# Altium PCB JacdacPowerUsbC4PortShared 31.PcbDoc (part 2 of 2)
Units mm, origin at the board's own origin, x right, y up, seen from the top; angles counter-clockwise.
Board outline 22.7 x 29.15 mm, 2 copper layers (Top Layer, Bottom Layer), stack 1.525 mm thick; 52 components, 32 nets, 174 pads, 34 vias.
Unrouted connection lines stored in the file: 59.
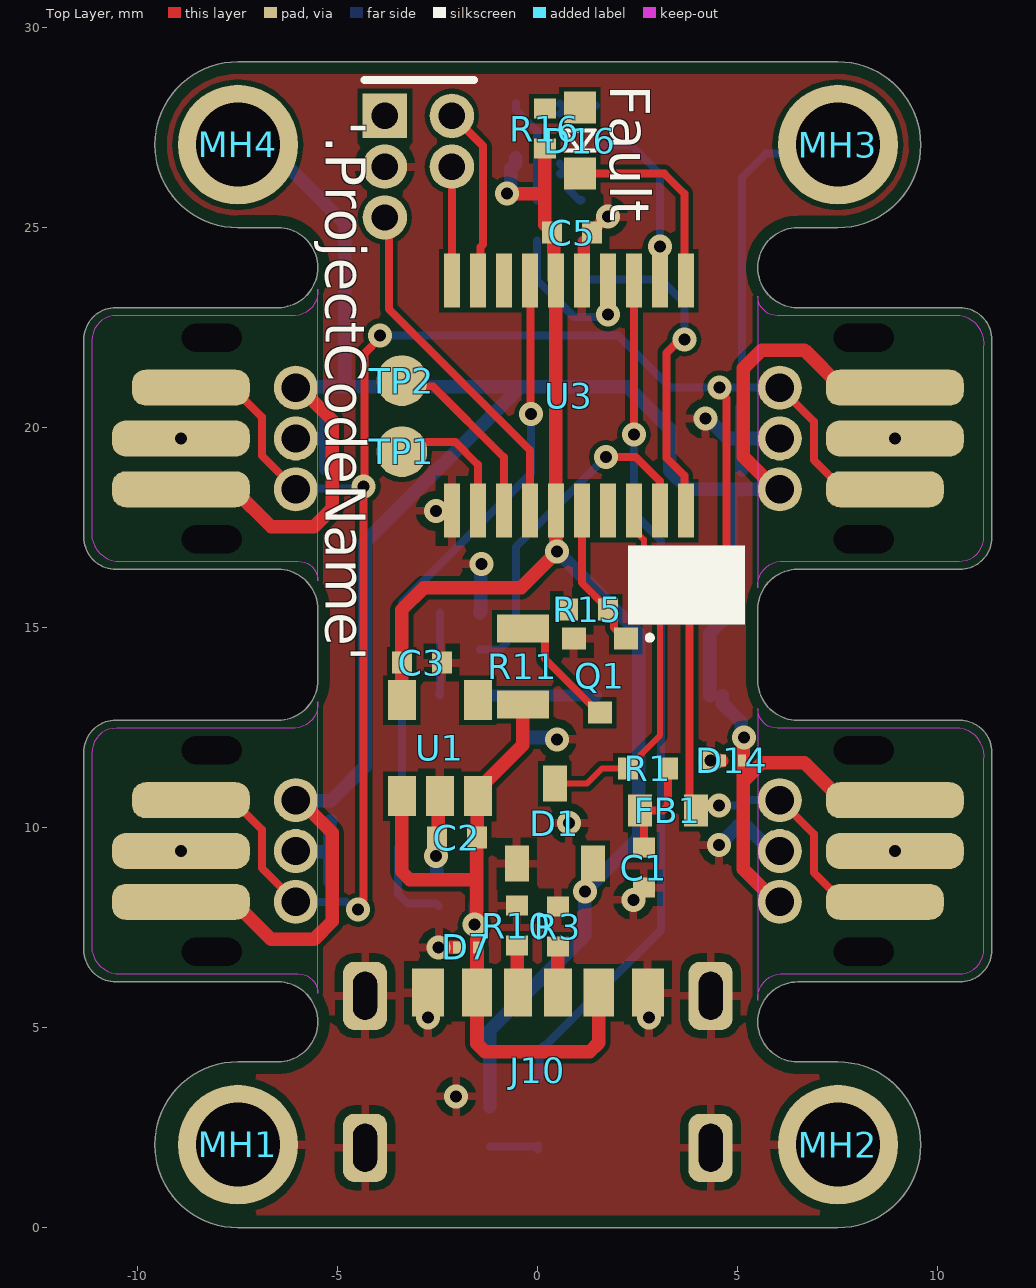
[diagram p0: Top Layer view]

## Part data (continued)
U3: library part "ST STM32F030F4P6", "STMICROELECTRONICS - STM32F030F4P6 - 32 Bit Microcontroller, Value Line, ARM Cortex-M0, 48 MHz, 16 KB, 4 KB, 20, TSSOP RoHS Compliant: Yes", Case/Package=TSSOP, Frequency=48MHz, Manufacturer=STMicroelectronics, Max Operating Temperature=85°C, Max Power Dissipation=182mW, Max Supply Voltage=3.6V, Min Operating Temperature=-40°C, Min Supply Voltage=2.4V, Package Quantity=74, Supplier Part Number 1=2393635, Categories="Integrated Circuits", Category=Microcontrollers, Checked=?, ComponentLink1Description="Online datasheet", ComponentLink1URL=https://datasheet.ciiva.com/29720/dm00088500-29720640.pdf, Contact Plating=Gold, Core Architecture=ARM, Created=DG, Data Bus Width=32b, Height=1.05mm, Interface=I2C,SPI,UART,USART, Lead Free="Lead Free", Length=6.6mm, Manufacturer Part Number=STM32F030F4P6, Max Frequency=48MHz, Memory Size=16KB, Memory Type=FLASH, Number of ADC Channels=16, Number of I2C Channels=1, Number of I/Os=15, Number of Pins=20, Number of Programmable I/O=15, Number of PWM Channels=6, Number of SPI Channels=1, Number of Timers/Counters=5, Oscillator Type=Internal, Packaging=Rail/Tube, Peripherals=POR,PWM,WDT,DMA, Pricing 1="1=0.97500, 25=0.85400, 50=0.75500, 100=0.65600, 250=0.61800, 500=0.58000, 1000=0.52500, 2500=0.46900 (GBP)", Pricing 3="100=0.43900, 250=0.38800, 1000=0.37300 (GBP)", Radiation Hardening=No, RAM Size=4KB, REACH SVHC="No SVHC", RoHS=Yes, Stock 1=1196, Stock 3=48, Supplier 1=Farnell, Supplier 2=Digi-Key, Supplier 3=RSComponents, Supplier Part Number 2=497-14044-5-ND, Supplier Part Number 3=7925925P, Watchdog Timer=Yes, Width=4.5mm

## Via types
v1: diameter 0.6, hole 0.3, Top Layer to Bottom Layer, tented both sides, 34 vias

## Nets (pads, with @x,y where several pads share a name; then routed paths per layer and width w, separated by ;. In a path a pad name is that pad's centre, name@x,y a point inside that pad or via, vN(x,y) a via of type N, cw(c..) or ccw(c..) an arc to the next point about the centre after c; other vN are vias at no path point)
3V3: C3.2 C5.2 D1.2 D4.1 R16.1 R17.1 U1.5 U3.5 U3.16 | length 35.1
  Top Layer w0.34: U1.5 C3.2 -3.4,15.449 -2.848,16.002 -0.416,16.002 0.45,16.868 U3.5 U3.16 0.4,23.725 0.4,24.85 0.175,25.075 0.175,25.85 ; v1(-0.775,25.85) 0.175,25.85 ; R16.1 0.175,25.85
  Bottom Layer w0.34: R17.1 -1.2,4.938 1.178,7.316 v1(1.178,8.409) 2.525,9.755 2.525,14.86 v1(0.484,16.902) ; v1(-0.775,25.85) -0.775,25.92 -0.68,26.015 -0.68,26.47 D4.1 D4.1@-0.55,26.75
\I\L\I\M\_\F\A\U\L\T\: R13.1 U3.17 | length 9.8
  Top Layer w0.15: U3.17 U3.17@-0.184,23.659 ; v1@-0.184,20.352 v1(-0.168,20.336)
  Top Layer w0.2: v1@-0.184,20.352 U3.17@-0.184,23.659
  Bottom Layer w0.2: R13.1 -3.393,15.207 -3.393,15.633 -0.168,18.858 v1(-0.168,20.336)
CC1: J10.A5 R10.1 | length 1.2
  Top Layer w0.34: R10.1 -0.512,7.037 -0.512,5.887 J10.A5
CC2: J10.B5 R3.1 | length 1.2
  Top Layer w0.34: J10.B5 R3.1 R3.1@0.5,7.075
DEBUG_0: TP1.1 U3.2 | length 3.3
  Top Layer w0.2: TP1.1@-3.4,19.639 -2.064,19.639 -1.5,19.075 U3.2
DEBUG_1: TP2.1 U3.3 | length 4.7
  Top Layer w0.2: TP2.1 -3.258,21.033 -2.62,21.033 -0.85,19.262 U3.3
GND: C1.1 C2.1 C3.1 C5.1 C7.1 C9.1 C12.1 D1.1 D7.2 D8.2 D9.2 D10.2 D11.2 D12.2 D13.2 D14.2 D15.2 J2.3 J3.2 J4.2 J6.2 J7.2 J10.1 J10.2 J10.3 J10.4 J10.A12 J10.B12 MH1.1 MH2.1 Q1.2 R3.2 R10.2 R12.1 R15.1 U1.2 U2.2 U3.1 U3.15 | length 20
  Top Layer w0.3: v1@-2.525,17.944 -2.169,17.944 U3.1 ; U3.15 1.15,23.725 1.15,24.65 1.35,24.85 1.35,24.9 1.728,25.278 v1(1.749,25.278)
  Top Layer w0.34: v1(-2.748,5.248) J10.B12@-2.749,5.874 ; C2.1 -2.487,9.788 -2.487,10.754 U1.2 ; v1(-2.482,7.008) D7.2 ; v1(2.387,8.196) 2.387,8.262 2.625,8.5 C1.1 ; J10.A12 2.775,5.85 v1(2.775,5.249) ; v1(4.32,11.675) D14.2
  Bottom Layer w0.34: J6.2@-6.05,19.73 -6.045,19.725 -5.3,19.725 ; J7.2@-5.981,9.485 -6.05,9.416 -6.034,9.4 -5.2,9.4 ; D11.2 -5.3,19.725 ; D12.2 -5.3,20.475 -5.3,19.725 ; D9.2 -5.2,9.4 ; D15.2 -5.2,10.15 -5.2,9.4 ; v1(-2.55,9.295) -2.525,9.27 -2.525,8.85 C9.1 ; C7.1@-2.525,9.295 C7.1 -2.487,9.588 -2.487,10.513 U2.2 ; R12.1 -1.431,15.394 -1.431,16.577 v1(-1.412,16.597) ; C12.1 -0.23,12.255 0.439,12.255 v1(0.484,12.21) ; v1(4.187,20.225) 4.258,20.225 4.753,19.73 5.1,19.73 ; v1(4.529,9.563) 5,10.033 D8.2 5.208,10.05 5.842,9.416 J3.2@6.05,9.416 ; D13.2 5.1,19.73 ; D10.2 5.1,19.73 ; J4.2@6.05,19.73 5.1,19.73
  other v1: -2.043,3.282 -8.925,9.416 8.925,9.416 0.774,10.111 -2.55,17.919 -8.925,19.73 8.925,19.73
HIGH_POWER_LED: D17.1 U3.13 | length 21.6
  Top Layer w0.2: U3.13 U3.13 2.401,19.828 v1(2.403,19.826)
  Bottom Layer w0.2: D17.1 0.04,3.74 0.04,4.439 0.157,4.556 0.195,4.556 3.081,7.442 3.081,17.178 2.403,17.856 v1(2.403,19.826)
ILIM_CTRL: R14.1 U3.9 | length 8.7
  Top Layer w0.2: v1(1.703,19.266) 2.447,19.266 3.05,18.663 U3.9
  Bottom Layer w0.2: R14.1 -0.959,14.45 -0.55,14.859 -0.55,17.013 v1(1.703,19.266)
JD_DATA: D8.1 D9.1 D10.1 D11.1 FB1.1 J3.1 J4.1 J6.1 J7.1 MH3.1 | length 49.8
  Top Layer w0.2: v1(-4.492,7.949) -4.492,8.057 -4.352,8.196 v1(-4.352,18.531) -4.336,18.547 -4.336,21.852 -3.941,22.247 v1(-3.941,22.305) ; v1(4.529,10.55) 4.075,10.55 FB1.1 3.795,10.58 3.795,15.795 4.713,16.712 4.713,20.73 4.546,20.896 v1(4.546,21.004)
  Bottom Layer w0.2: J7.1@-6.05,8.146 -5.254,8.146 -5.25,8.15 -4.793,8.15 -4.592,7.949 v1(-4.492,7.949) ; J6.1@-6.05,18.46 -6.035,18.475 -4.408,18.475 v1(-4.352,18.531) ; v1(-3.941,22.305) 2.01,22.305 3.316,21 4.542,21 v1(4.546,21.004) ; v1(4.529,10.55) D8.1 5.05,10.55 5.186,10.686 J3.1@6.05,10.686 ; v1@4.546,21 D10.1 ; J4.1@6.05,21 D10.1 ; MH3.1 7.277,26.85 5.7,26.85 5.1,26.25 D10.1
JD_DATA_MCU: D1.3 R1.1 U3.8 | length 9
  Top Layer w0.15: D1.3 1.228,11.1 1.603,11.475 R1.1 2.25,11.5 3.05,12.3 3.05,16.059 2.65,16.459 2.65,17.2 2.4,17.45 U3.8
JD_PWR: D5.1 D12.1 D13.1 D14.1 D15.1 J3.3 J4.3 J6.3 J7.3 MH4.1 | length 42.2
  Top Layer w0.34: 5.141,11.169 5.141,12.238 v1(5.158,12.255)
  Bottom Layer w0.34: MH4.1 -6.798,27.073 -5.516,25.791 -5.075,25.35 -4.822,25.097 -4.822,21.053 -4.807,21.038 ; J7.3@-6.05,10.686 -6.039,10.675 D15.1 -4.32,11.53 -4.32,17.14 -0.435,21.025 ; J6.3@-6.05,21 -6.025,21.025 D12.1 -4.822,21.025 -0.435,21.025 ; D5.1 4.3,14.859 4.816,15.375 4.816,18.45 4.806,18.46 ; D5.1@4.608,13.3 4.608,13.117 5.088,12.637 5.088,12.396 5.108,12.375 v1@5.108,12.287 ; J4.3@6.05,18.46 5.11,18.46 D13.1 5.09,18.46 4.806,18.46 ; -0.435,21.025 2.241,21.025 3.295,19.971 3.295,18.928 3.764,18.46 4.806,18.46
JD_RGB_B: R4.2 U3.14 | length 3.2
  Bottom Layer w0.2: R4.2 -0.025,23.7 0.906,22.769 1.689,22.769 v1(1.75,22.83)
JD_RGB_G: R5.2 U3.12 | length 3.8
  Bottom Layer w0.2: R5.2 2.35,27.05 3.05,26.35 v1(3.05,24.525) v1@2.964,24.611
JD_RGB_R: R6.2 U3.10 | length 9.4
  Top Layer w0.2: v1(3.662,22.207) 3.554,22.207 3.217,21.869 3.217,19.248 3.662,18.802 3.662,17.962 U3.10
  Bottom Layer w0.2: R6.2 1.075,23.817 1.192,23.7 3.081,23.7 3.662,23.119 v1(3.662,22.207)
JD_STATUS: U3.7
NetC1_2: C1.2 FB1.2 R1.2 | length 2.6
  Top Layer w0.2: C1.2 2.65,10.325 FB1.2 3.133,10.425 3.25,10.542 R1.2
NetC9_2: C9.2 R7.2 R13.2 U2.3 U2.4 | length 7
  Bottom Layer w0.2: R13.2 U2.4 U2.3 -3.4,9.608 -3.5,9.508 C9.2 -3.5,8.349 -3.251,8.1 R7.2 R7.2@-2.487,8.037
NetC12_2: C12.2 D5.2 U2.6 | length 3
  Bottom Layer w0.3: U2.6 C12.2 D5.2
NetD4_2: D4.2 R6.1 | length 1.2
  Bottom Layer w0.2: D4.2@0.55,26.35 D4.2@0.575,26.325 ; D4.2 0.75,26.4 0.75,25.975 1.05,25.675 R6.1 R6.1@1.088,25.687
NetD4_3: D4.3 R5.1 | length 1
  Bottom Layer w0.2: D4.3@0.55,27.85 D4.3@0.575,27.875 ; D4.3 0.6,28.05 R5.1
NetD4_4: D4.4 R4.1 | length 2.6
  Bottom Layer w0.2: D4.4 -0.55,27.95 -0.025,27.425 R4.1
NetD16_2: D16.2 R16.2 | length 0.1
  Top Layer w0.15: D16.2@0.825,28.025 D16.2@0.875,27.975
NetD17_2: D17.2 R17.2 | length 1.3
  Bottom Layer w0.2: R17.2 D17.2@-0.075,2.025 ; D17.2@0,1.95 D17.2@-0.075,2.025 ; D17.2 -0.025,2.025 D17.2@-0.075,2.025
NetQ1_3: Q1.3 R11.1 | length 3.1
  Top Layer w0.2: R11.1 -0.075,14.975 0.175,14.725 0.175,14.225 1.525,12.875 Q1.3
NetR12_2: R12.2 R14.2 U2.5 | length 2.1
  Bottom Layer w0.2: U2.5@-2.475,13.325 U2.5 R14.2 R12.2
POWER_FAULT_LED: D16.1 U3.11 | length 5
  Top Layer w0.2: D16.1 3.162,26.35 3.662,25.85 3.662,23.713 U3.11
RESET: J2.5 U3.4 | length 8.8
  Top Layer w0.2: J2.5@-3.725,25.28 -3.725,22.97 -0.2,19.445 U3.4
SWCLK: J2.4 U3.20 | length 2.9
  Top Layer w0.2: U3.20 J2.4@-2.15,26.55
SWDIO: J2.2 U3.19 | length 4.5
  Top Layer w0.2: J2.2@-2.15,27.82 -1.37,27.04 -1.37,26.85 -1.369,26.848 -1.369,26.202 -1.37,26.2 -1.37,24.58 -1.438,24.512 -1.438,23.737 U3.19
VUSB: C2.2 C7.2 D7.1 J10.A9 J10.B9 R7.1 R11.2 U1.1 U1.3 U2.1 | length 20.3
  Top Layer w0.34: U1.1 -3.4,8.899 -3.201,8.7 -1.575,8.7 -1.525,8.65 ; C2.2 -1.513,9.763 -1.513,10.779 U1.3 -1.5,10.941 -0.375,12.066 R11.2 ; C2.2@-1.488,9.713 -1.525,9.675 -1.525,8.65 ; J10.A9 1.52,4.62 1.299,4.399 -1.321,4.399 -1.52,4.598 J10.B9 -1.52,7.003 -1.53,7.013 -1.53,7.455 -1.58,7.505 v1(-1.58,7.575) -1.53,7.625 -1.53,8.305 -1.525,8.31 -1.525,8.65
  Bottom Layer w0.34: v1(-1.58,7.575) -1.565,7.59 -1.565,8.06 -1.538,8.087 -1.538,9.538 C7.2 -1.512,9.563 -1.512,10.537 U2.1
VUSB_PULSE: Q1.1 R15.2 U3.6 | length 3.7
  Top Layer w0.2: U3.6 1.1,16.125 1.75,15.475 R15.2 1.9,15.3 1.9,15 2.175,14.725 Q1.1
pads on no net: J2.1 J3. J4. J6. J7. U1.4 U3.18

## Polygon pours and split planes (outlines as drawn)
GND on Bottom Layer "bottom" (solid, pour order 5): -9.573,2.073 ccw(c-7.5,2.073) -7.5,0 7.5,0 ccw(c7.501,2.072) 9.573,2.071 ccw(c7.5,2.071) 7.5,4.145 6.5,4.145 cw(c6.5,5.144) 5.5,5.144 cw(c6.5,5.144) 6.5,6.144 10.55,6.144 ccw(c10.55,6.944) 11.35,6.944 11.35,6.928 11.35,11.868 11.35,11.884 ccw(c10.55,11.884) 10.55,12.684 6.5,12.684 cw(c6.5,13.684) 5.5,13.684 5.5,15.459 cw(c6.5,15.459) 6.5,16.459 10.55,16.459 ccw(c10.55,17.259) 11.35,17.259 11.35,17.275 11.35,22.215 11.35,22.199 ccw(c10.55,22.199) 10.55,22.999 6.5,22.999 cw(c6.5,23.999) 5.5,23.999 cw(c6.5,23.999) 6.5,24.999 7.5,24.998 ccw(c7.5,27.071) 9.573,27.071 ccw(c7.499,27.072) 7.5,29.146 -7.5,29.146 ccw(c-7.5,27.073) -9.573,27.073 ccw(c-7.5,27.073) -7.5,25 -6.5,25 cw(c-6.5,24) -5.5,24 cw(c-6.5,24) -6.5,23 -10.55,23 ccw(c-10.55,22.2) -11.35,22.2 -11.35,22.216 -11.35,17.276 -11.35,17.26 ccw(c-10.55,17.26) -10.55,16.46 -6.5,16.46 cw(c-6.5,15.46) -5.5,15.46 -5.5,13.686 cw(c-6.5,13.686) -6.5,12.686 -10.55,12.686 ccw(c-10.55,11.886) -11.35,11.886 -11.35,11.87 -11.35,6.93 -11.35,6.946 ccw(c-10.55,6.946) -10.55,6.146 -6.5,6.146 cw(c-6.5,5.146) -5.5,5.146 cw(c-6.5,5.146) -6.5,4.146 -7.5,4.146 ccw(c-7.5,2.073)
GND on Top Layer "GND" (solid, pour order 6): -9.573,2.073 ccw(c-7.5,2.073) -7.5,0 7.5,0 ccw(c7.501,2.072) 9.573,2.071 ccw(c7.5,2.071) 7.5,4.145 6.5,4.145 cw(c6.5,5.144) 5.5,5.144 cw(c6.5,5.144) 6.5,6.144 10.55,6.144 ccw(c10.55,6.944) 11.35,6.944 11.35,6.928 11.35,11.868 11.35,11.884 ccw(c10.55,11.884) 10.55,12.684 6.5,12.684 cw(c6.5,13.684) 5.5,13.684 5.5,15.459 cw(c6.5,15.459) 6.5,16.459 10.55,16.459 ccw(c10.55,17.259) 11.35,17.259 11.35,17.275 11.35,22.215 11.35,22.199 ccw(c10.55,22.199) 10.55,22.999 6.5,22.999 cw(c6.5,23.999) 5.5,23.999 cw(c6.5,23.999) 6.5,24.999 7.5,24.998 ccw(c7.5,27.071) 9.573,27.071 ccw(c7.499,27.072) 7.5,29.146 -7.5,29.146 ccw(c-7.5,27.073) -9.573,27.073 ccw(c-7.5,27.073) -7.5,25 -6.5,25 cw(c-6.5,24) -5.5,24 cw(c-6.5,24) -6.5,23 -10.55,23 ccw(c-10.55,22.2) -11.35,22.2 -11.35,22.216 -11.35,17.276 -11.35,17.26 ccw(c-10.55,17.26) -10.55,16.46 -6.5,16.46 cw(c-6.5,15.46) -5.5,15.46 -5.5,13.686 cw(c-6.5,13.686) -6.5,12.686 -10.55,12.686 ccw(c-10.55,11.886) -11.35,11.886 -11.35,11.87 -11.35,6.93 -11.35,6.946 ccw(c-10.55,6.946) -10.55,6.146 -6.5,6.146 cw(c-6.5,5.146) -5.5,5.146 cw(c-6.5,5.146) -6.5,4.146 -7.5,4.146 ccw(c-7.5,2.073)

## Other copper
Top Layer:
  text "Top Layer" at 28.4,25.3 h1.7
Bottom Layer:
  text "Bottom Layer" at 28.401,23.8 h1.7

## Silkscreen, mask and mechanical layers (free items; w line width, h text height)
Top Overlay:
  region: 5.175,15.075 5.175,17.054 2.25,17.054 2.25,15.075
  text "Fault" at 1.809,28.576 h1 r270
  text "'.ProjectCodeName'" at -5.3,27.675 h1 r270
  text "Top Overlay" at 28.4,17 h1.7
Bottom Overlay:
  region: -1.175,19.825 -1.175,21.15 -2.3,21.15 -2.3,19.825
  text "'.ProjectCodenameID'-'.ProjectRevision'" at 3.727,20.008 h1
  text "Bottom Overlay" at 28.401,15.5 h1.7
  text "Bus current" at 1.775,8.05 h1 r90
  text "900mA" at 3.05,7.575 h1 r90
Top Paste:
  text "Top Paste" at 28.4,14.093 h1.7
Bottom Paste:
  text "Bottom Paste" at 28.401,12.614 h1.7
Top Solder:
  text "Top Solder (resist)" at 28.4,11.293 h1.7
Bottom Solder:
  text "Bottom Solder (resist)" at 28.401,9.802 h1.7
Dimension:
  lines w0.1: -11.35,6.93 -11.35,11.87 ; -11.35,6.946 ccw(c-10.55,6.946) -10.55,6.146 -6.5,6.146 cw(c-6.5,5.146) -5.5,5.146 cw(c-6.5,5.146) -6.5,4.146 -7.5,4.146 ccw(c-7.5,2.073) -9.573,2.073 ccw(c-7.5,2.073) -7.5,0 7.5,0 ; -11.35,11.886 cw(c-10.55,11.886) -10.55,12.686 -6.5,12.686 ccw(c-6.5,13.686) -5.5,13.686 -5.5,15.46 ccw(c-6.5,15.46) -6.5,16.46 -10.55,16.46 cw(c-10.55,17.26) -11.35,17.26 ; -11.35,17.276 -11.35,22.216 ; -11.35,22.2 cw(c-10.55,22.2) -10.55,23 -6.5,23 ccw(c-6.5,24) -5.5,24 ccw(c-6.5,24) -6.5,25 ; -6.5,25 -7.5,25 cw(c-7.5,27.073) -9.573,27.073 cw(c-7.5,27.073) -7.5,29.146 7.5,29.146 cw(c7.5,27.073) 9.573,27.073 ; 6.5,4.144 cw(c6.5,5.144) 5.5,5.144 cw(c6.5,5.144) 6.5,6.144 10.55,6.144 ccw(c10.55,6.944) 11.35,6.944 ; 6.5,4.145 7.5,4.145 cw(c7.5,2.071) 9.573,2.071 cw(c7.5,2.071) 7.5,-0.002 ; 7.5,24.998 ccw(c7.5,27.071) 9.573,27.071 ; 7.5,24.998 6.5,24.998 ccw(c6.5,23.999) 5.5,23.999 ccw(c6.5,23.999) 6.5,22.999 10.55,22.999 cw(c10.55,22.199) 11.35,22.199 ; 11.35,6.928 11.35,11.868 ; 11.35,11.884 ccw(c10.55,11.884) 10.55,12.684 6.5,12.684 cw(c6.5,13.684) 5.5,13.684 5.5,15.459 cw(c6.5,15.459) 6.5,16.459 10.55,16.459 ccw(c10.55,17.259) 11.35,17.259 ; 11.35,17.275 11.35,22.215
Fabrication notes:
  lines w0.1: -9.541,3.708 -9.541,5.933 ; -9.466,25.567 -9.466,23.342 ; -8.941,11.928 -9.541,11.328 -9.541,5.933 ; -8.866,17.347 -9.466,17.947 -9.466,23.342 ; -8.816,6.658 -9.541,5.933 ; -8.741,22.617 -9.466,23.342 ; -8.365,28.1 -8.715,28.45 ; -8.365,28.8 -8.715,28.45 ; -5.736,28.45 -8.715,28.45 ; -5.625,31.35 -5.605,5.655 ; 1.178,23.138 1.178,29.84 ; 5.614,23.348 5.634,-2.347 ; 5.745,0.553 8.724,0.553 ; 8.374,0.203 8.724,0.553 ; 8.374,0.903 8.724,0.553 ; 8.75,6.386 9.475,5.661 ; 8.825,22.345 9.55,23.07 ; 8.875,11.656 9.475,11.056 9.475,5.661 ; 8.95,17.075 9.55,17.675 9.55,23.07 ; 9.475,3.436 9.475,5.661 ; 9.55,25.295 9.55,23.07 ; -2.375,18.531 3.95,18.531 3.95,23.07 -2.375,23.07 -2.375,18.531
  text "no board edge pips/ / rat's teeth/mouse bites  / above this line - make  / sure board edge is clean" at -3.075,31.325 h1.7 r90
  text "place any PCB manufacturer identifiers / in this region on bottom layer,  / so they will be underneath the TSSOP" at 3.253,30.004 h1.7 r90
  text "non-plated slots x2" at 9.707,25.575 h1.7 r90
  text "non-plated slots x2" at -9.234,25.567 h1.7 r90
  text "Fabrication Notes" at 28.401,22.514 h1.7
  text "non-plated slots x2" at -9.234,-7.175 h1.7 r90
  text "non-plated slots x2" at 9.857,-7.325 h1.7 r90
  text "no board edge pips/ / rat's teeth/mouse bites  / below this line - make  / sure board edge is clean" at 8.175,-16.5 h1.7 r90
Route Tool Path:
  lines w0.1: -11.35,6.93 -11.35,11.87 ; -11.35,6.946 ccw(c-10.55,6.946) -10.55,6.146 -6.5,6.146 cw(c-6.5,5.146) -5.5,5.146 cw(c-6.5,5.146) -6.5,4.146 -7.5,4.146 ccw(c-7.5,2.073) -9.573,2.073 ccw(c-7.5,2.073) -7.5,0 7.5,0 ; -11.35,11.886 cw(c-10.55,11.886) -10.55,12.686 -6.5,12.686 ccw(c-6.5,13.686) -5.5,13.686 -5.5,15.46 ccw(c-6.5,15.46) -6.5,16.46 -10.55,16.46 cw(c-10.55,17.26) -11.35,17.26 ; -11.35,17.276 -11.35,22.216 ; -11.35,22.2 cw(c-10.55,22.2) -10.55,23 -6.5,23 ccw(c-6.5,24) -5.5,24 ccw(c-6.5,24) -6.5,25 ; -6.5,25 -7.5,25 cw(c-7.5,27.073) -9.573,27.073 cw(c-7.5,27.073) -7.5,29.146 7.5,29.146 cw(c7.5,27.073) 9.573,27.073 ; 6.5,4.144 cw(c6.5,5.144) 5.5,5.144 cw(c6.5,5.144) 6.5,6.144 10.55,6.144 ccw(c10.55,6.944) 11.35,6.944 ; 6.5,4.145 7.5,4.145 cw(c7.5,2.071) 9.573,2.071 cw(c7.5,2.071) 7.5,-0.002 ; 7.5,24.998 ccw(c7.5,27.071) 9.573,27.071 ; 7.5,24.998 6.5,24.998 ccw(c6.5,23.999) 5.5,23.999 ccw(c6.5,23.999) 6.5,22.999 10.55,22.999 cw(c10.55,22.199) 11.35,22.199 ; 11.35,6.928 11.35,11.868 ; 11.35,11.884 ccw(c10.55,11.884) 10.55,12.684 6.5,12.684 cw(c6.5,13.684) 5.5,13.684 5.5,15.459 cw(c6.5,15.459) 6.5,16.459 10.55,16.459 ccw(c10.55,17.259) 11.35,17.259 ; 11.35,17.275 11.35,22.215
Board Outline:
  lines w0.2: -11.35,6.93 -11.35,11.87 ; -11.35,6.946 ccw(c-10.55,6.946) -10.55,6.146 -6.5,6.146 cw(c-6.5,5.146) -5.5,5.146 cw(c-6.5,5.146) -6.5,4.146 -7.5,4.146 ccw(c-7.5,2.073) -9.573,2.073 ccw(c-7.5,2.073) -7.5,0 7.5,0 ; -11.35,11.886 cw(c-10.55,11.886) -10.55,12.686 -6.5,12.686 ccw(c-6.5,13.686) -5.5,13.686 -5.5,15.46 ccw(c-6.5,15.46) -6.5,16.46 -10.55,16.46 cw(c-10.55,17.26) -11.35,17.26 ; -11.35,17.276 -11.35,22.216 ; -11.35,22.2 cw(c-10.55,22.2) -10.55,23 -6.5,23 ccw(c-6.5,24) -5.5,24 ccw(c-6.5,24) -6.5,25 ; -6.5,25 -7.5,25 cw(c-7.5,27.073) -9.573,27.073 cw(c-7.5,27.073) -7.5,29.146 7.5,29.146 cw(c7.5,27.073) 9.573,27.073 ; 6.5,4.144 cw(c6.5,5.144) 5.5,5.144 cw(c6.5,5.144) 6.5,6.144 10.55,6.144 ccw(c10.55,6.944) 11.35,6.944 ; 6.5,4.145 7.5,4.145 cw(c7.5,2.071) 9.573,2.071 cw(c7.5,2.071) 7.5,-0.002 ; 7.5,24.998 ccw(c7.5,27.071) 9.573,27.071 ; 7.5,24.998 6.5,24.998 ccw(c6.5,23.999) 5.5,23.999 ccw(c6.5,23.999) 6.5,22.999 10.55,22.999 cw(c10.55,22.199) 11.35,22.199 ; 11.35,6.928 11.35,11.868 ; 11.35,11.884 ccw(c10.55,11.884) 10.55,12.684 6.5,12.684 cw(c6.5,13.684) 5.5,13.684 5.5,15.459 cw(c6.5,15.459) 6.5,16.459 10.55,16.459 ccw(c10.55,17.259) 11.35,17.259 ; 11.35,17.275 11.35,22.215
  text "Board Outline" at 28.401,21.214 h1.7
Top Assy:
  lines w0.1: -11.35,6.93 -11.35,11.87 ; -11.35,6.946 ccw(c-10.55,6.946) -10.55,6.146 -6.5,6.146 cw(c-6.5,5.146) -5.5,5.146 cw(c-6.5,5.146) -6.5,4.146 -7.5,4.146 ccw(c-7.5,2.073) -9.573,2.073 ccw(c-7.5,2.073) -7.5,0 7.5,0 ; -11.35,11.886 cw(c-10.55,11.886) -10.55,12.686 -6.5,12.686 ccw(c-6.5,13.686) -5.5,13.686 -5.5,15.46 ccw(c-6.5,15.46) -6.5,16.46 -10.55,16.46 cw(c-10.55,17.26) -11.35,17.26 ; -11.35,17.276 -11.35,22.216 ; -11.35,22.2 cw(c-10.55,22.2) -10.55,23 -6.5,23 ccw(c-6.5,24) -5.5,24 ccw(c-6.5,24) -6.5,25 ; -6.5,25 -7.5,25 cw(c-7.5,27.073) -9.573,27.073 cw(c-7.5,27.073) -7.5,29.146 7.5,29.146 cw(c7.5,27.073) 9.573,27.073 ; 6.5,4.144 cw(c6.5,5.144) 5.5,5.144 cw(c6.5,5.144) 6.5,6.144 10.55,6.144 ccw(c10.55,6.944) 11.35,6.944 ; 6.5,4.145 7.5,4.145 cw(c7.5,2.071) 9.573,2.071 cw(c7.5,2.071) 7.5,-0.002 ; 7.5,24.998 ccw(c7.5,27.071) 9.573,27.071 ; 7.5,24.998 6.5,24.998 ccw(c6.5,23.999) 5.5,23.999 ccw(c6.5,23.999) 6.5,22.999 10.55,22.999 cw(c10.55,22.199) 11.35,22.199 ; 11.35,6.928 11.35,11.868 ; 11.35,11.884 ccw(c10.55,11.884) 10.55,12.684 6.5,12.684 cw(c6.5,13.684) 5.5,13.684 5.5,15.459 cw(c6.5,15.459) 6.5,16.459 10.55,16.459 ccw(c10.55,17.259) 11.35,17.259 ; 11.35,17.275 11.35,22.215
  text "Top Assy" at 28.4,19.9 h1.7
Bottom Assy:
  lines w0.1: -11.35,6.93 -11.35,11.87 ; -11.35,6.946 ccw(c-10.55,6.946) -10.55,6.146 -6.5,6.146 cw(c-6.5,5.146) -5.5,5.146 cw(c-6.5,5.146) -6.5,4.146 -7.5,4.146 ccw(c-7.5,2.073) -9.573,2.073 ccw(c-7.5,2.073) -7.5,0 7.5,0 ; -11.35,11.886 cw(c-10.55,11.886) -10.55,12.686 -6.5,12.686 ccw(c-6.5,13.686) -5.5,13.686 -5.5,15.46 ccw(c-6.5,15.46) -6.5,16.46 -10.55,16.46 cw(c-10.55,17.26) -11.35,17.26 ; -11.35,17.276 -11.35,22.216 ; -11.35,22.2 cw(c-10.55,22.2) -10.55,23 -6.5,23 ccw(c-6.5,24) -5.5,24 ccw(c-6.5,24) -6.5,25 ; -6.5,25 -7.5,25 cw(c-7.5,27.073) -9.573,27.073 cw(c-7.5,27.073) -7.5,29.146 7.5,29.146 cw(c7.5,27.073) 9.573,27.073 ; 6.5,4.144 cw(c6.5,5.144) 5.5,5.144 cw(c6.5,5.144) 6.5,6.144 10.55,6.144 ccw(c10.55,6.944) 11.35,6.944 ; 6.5,4.145 7.5,4.145 cw(c7.5,2.071) 9.573,2.071 cw(c7.5,2.071) 7.5,-0.002 ; 7.5,24.998 ccw(c7.5,27.071) 9.573,27.071 ; 7.5,24.998 6.5,24.998 ccw(c6.5,23.999) 5.5,23.999 ccw(c6.5,23.999) 6.5,22.999 10.55,22.999 cw(c10.55,22.199) 11.35,22.199 ; 11.35,6.928 11.35,11.868 ; 11.35,11.884 ccw(c10.55,11.884) 10.55,12.684 6.5,12.684 cw(c6.5,13.684) 5.5,13.684 5.5,15.459 cw(c6.5,15.459) 6.5,16.459 10.55,16.459 ccw(c10.55,17.259) 11.35,17.259 ; 11.35,17.275 11.35,22.215
  text "Bottom Assy" at 28.401,18.5 h1.7

## Dimensions
-11.35,6.93 to 11.35,6.928 on Dimension
-7.5,0 to -7.5,29.146 on Dimension

## Text inside footprints (layer, text, board x,y; h text height)
J3: Alignment "board outline  / for 'innie'" at 5.5,13.446 h1.2 r90; Alignment "board outline  / for 'outie'" at 8.2,13.386 h1.2 r90; Mechanical 9 "JACDAC  / cable connector  / body" at 15.508,4.595 h1.7 r270; Fabrication notes "Bevel/chamfer edge of PCB here" at 13.658,12.169 h1.7 r90
J4: Alignment "board outline  / for 'outie'" at 7.95,23.261 h1.2 r90; Alignment "board outline  / for 'innie'" at 4.925,22.911 h1.2 r90; Mechanical 9 "JACDAC  / cable connector  / body" at 15.508,14.909 h1.7 r270; Fabrication notes "Bevel/chamfer edge of PCB here" at 12.33,22.757 h1.7 r90
J6: Alignment "board outline  / for 'innie'" at -3.8,10.786 h1.2 r90; Alignment "board outline  / for 'outie'" at -6.775,10.586 h1.2 r90; Mechanical 9 "JACDAC  / cable connector  / body" at -15.508,24.551 h1.7 r90; Fabrication notes "Bevel/chamfer edge of PCB here" at -13.525,-1.199 h1.7 r90
J7: Alignment "board outline  / for 'outie'" at -6.775,0.036 h1.2 r90; Alignment "board outline  / for 'innie'" at -3.5,-0.339 h1.2 r90; Mechanical 9 "JACDAC  / cable connector  / body" at -15.508,14.237 h1.7 r90; Fabrication notes "Bevel/chamfer edge of PCB here" at -12.251,-11.749 h1.7 r90
MH4: Alignment "5mm dia keepout  / for traces and  / components to  / allow space for  / bushes/standoffs/ / nuts/screw heads" at -8.389,29.867 h0.5 r90; Alignment "board outline can  / be on 2.0mm   / radius if necessary" at -4.798,29.873 h0.5 r90